# Altium PCB PCB_Flaps第三版_2023-07-31.pcbdoc
Units mil, origin at the board's own origin, x right, y up, seen from the top; angles counter-clockwise.
Board outline 2525.74 x 2390.85 mil, 2 copper layers (Top Layer, Bottom Layer); 36 components, 46 nets, 148 pads, 37 vias.
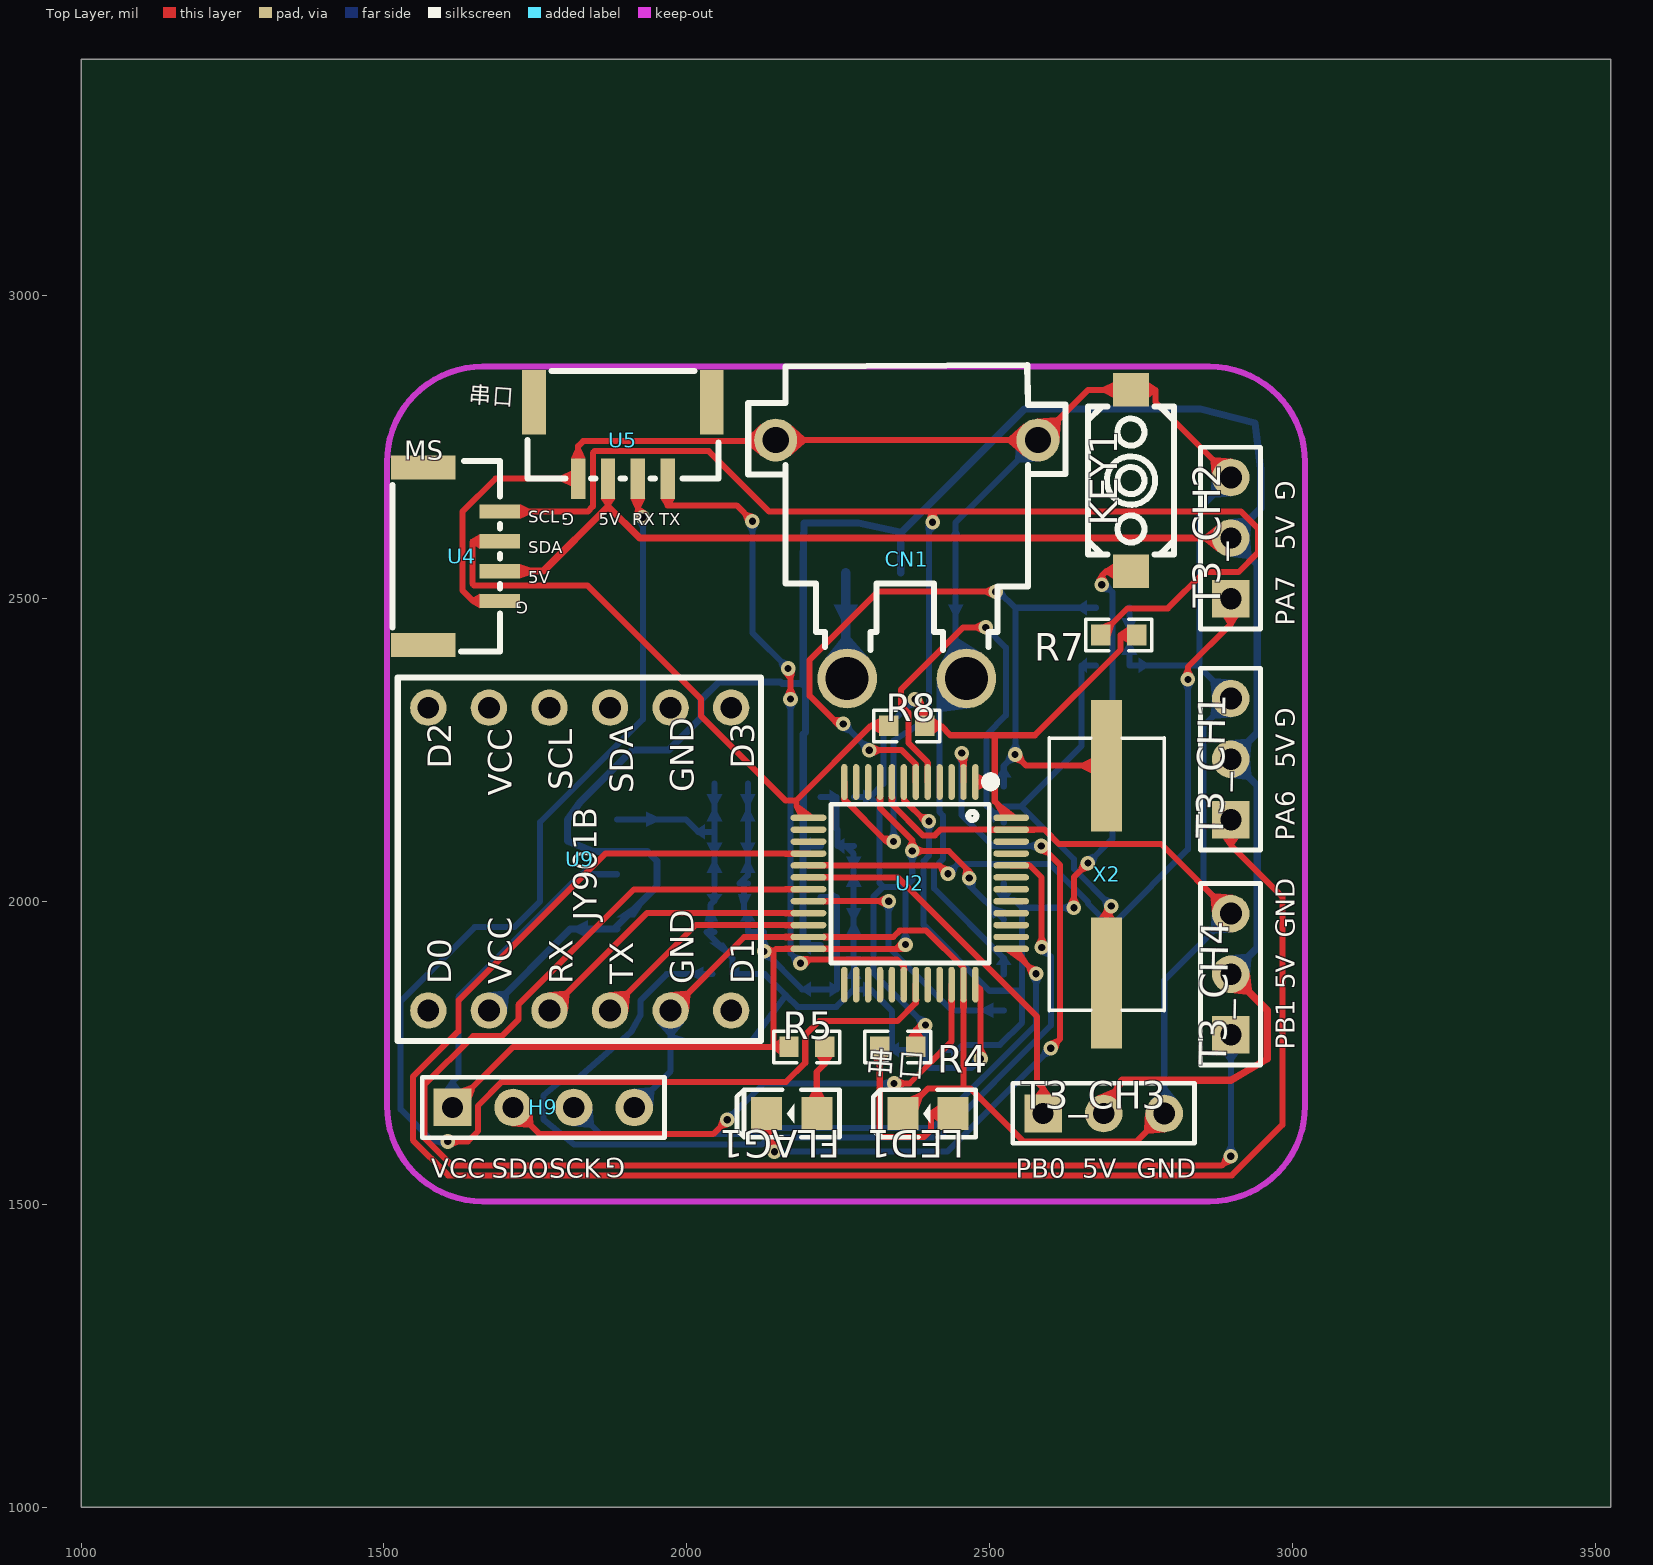
[diagram p0: Top Layer view]
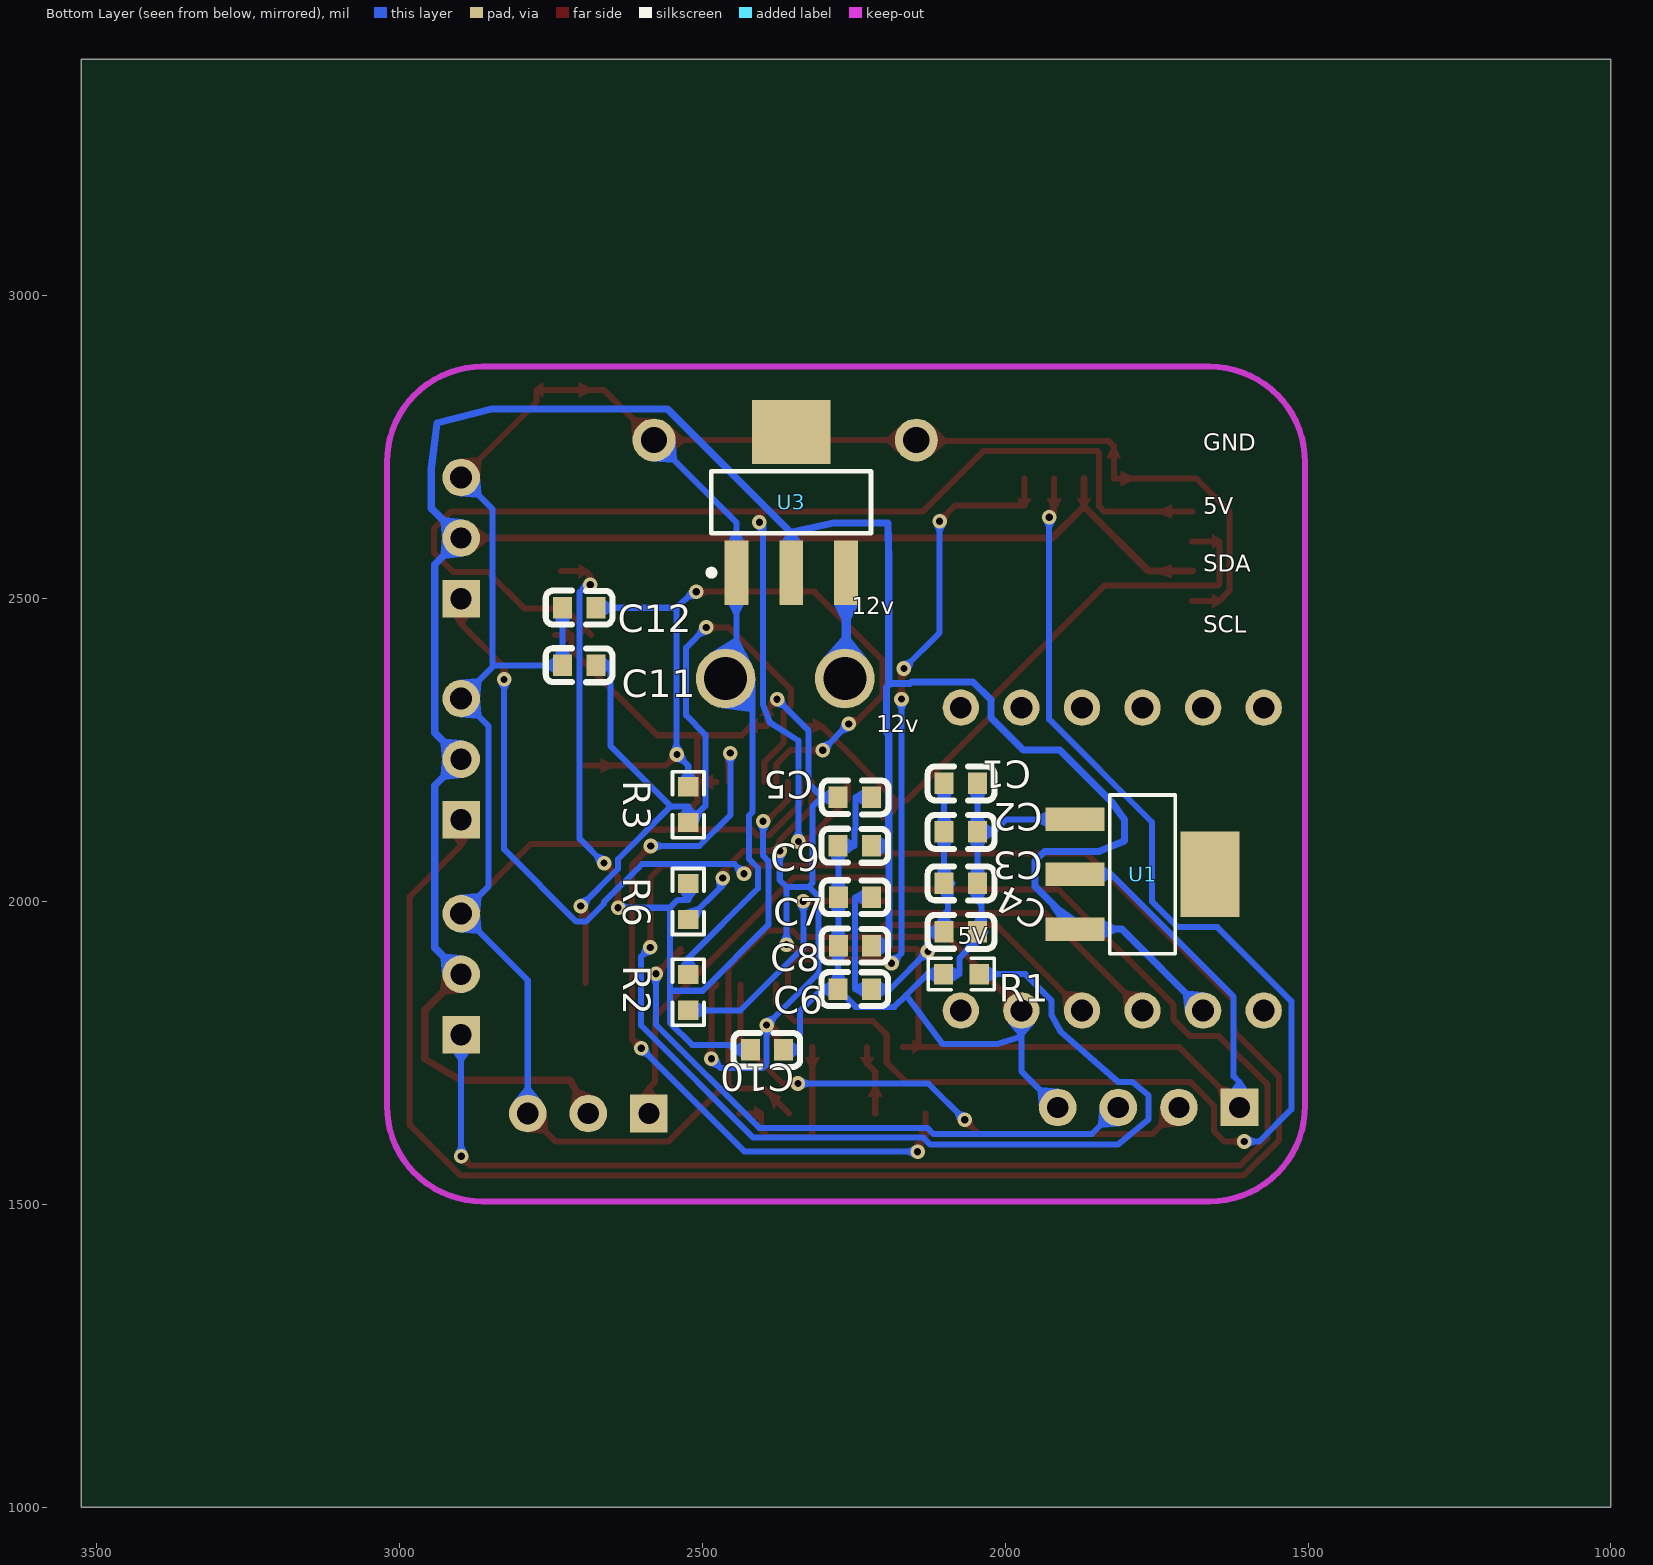
[diagram p1: Bottom Layer view, seen from below]

## Layer stack, top to bottom
Top Layer: signal copper (thickness not stored)
Dielectric: dielectric 12.6, FR-4, Dk 4.8
Bottom Layer: signal copper (thickness not stored)

## Board outline
3525.74,1000 1000,1000 1000,3390.85 3525.74,3390.85

## Components (designator, comment, footprint, x,y, rotation, side; value= is the part's Value field where it differs from the comment)
C1 "100nF" C0603#1 2073.27,2195 r180 bottom
C2 "100nF" C0603#1 2073.27,2115 r180 bottom
C3 "100nF" C0603#1 2073.27,2030 r180 bottom
C4 "100nF" C0603#1 2073.27,1950 r180 bottom
C5 "10uF" C0603#1 2248.27,2172.19 r180 bottom
C6 "100nF" C0603#2 2248.27,1855 r0 bottom
C7 "10uF" C0603#1 2247.99,2006.98 r0 bottom
C8 "10uF" C0603#1 2247.99,1926.98 r0 bottom
C9 "100nF" C0603#2 2248.27,2091.74 r0 bottom
C10 "0.1UF" C0603#1 2393.27,1755 r0 bottom
C11 "22pF" C0603#1 2703.27,2390 r0 bottom
C12 "22pF" C0603#1 2703.27,2485 r0 bottom
CN1 "XT30PW-M" CONN-TH_XT30PW-M 2363.27,2565 r180 top
FLAG1 "LED-0805_R" LED0805_RED 2173.27,1650 r180 top
H9 "HDR-F-2.54_1x4" HDR-F-2.54_1X4 1763.27,1660 r0 top
KEY1 "K2-3.6×6.1_SMD" KEY-SMD_2P-L6.2-W3.6-LS8.0 2733.27,2695 r90 top
LED1 "LED-0805_R" LED0805_RED 2398.27,1650 r180 top
R1 "10K" R0603#1 2072.46,1880.21 r180 bottom
R2 "10K" R0603#1 2523.27,1850 r90 bottom
R3 "1M" R0603#1 2523.27,2160 r90 bottom
R4 "510R" R0603#2 2348.27,1760 r180 top
R5 "510R" R0603#2 2198.27,1760 r0 top
R6 "10k" R0603#1 2523.27,2000 r90 bottom
R7 "10K" R0603#2 2713.27,2440 r180 top
R8 "10K" R0603#2 2363.27,2290 r180 top
T3_CH1 "HDR-F-2.54_1x3" HDR-F-2.54_1X3 2898.27,2235 r90 top
T3_CH2 "HDR-F-2.54_1x3" HDR-F-2.54_1X3 2898.27,2600 r90 top
T3_CH3 "HDR-F-2.54_1x3" HDR-F-2.54_1X3 2688.27,1650 r0 top
T3_CH4 "HDR-F-2.54_1x3" HDR-F-2.54_1X3 2898.27,1880 r90 top
U1 "AMS1117-3.3_SOT223" SOT-223-4_L6.5-W3.5-P2.30-LS7.0-BR 1773.27,2045 r180 bottom
U2 "STM32F103C8T6" LQFP-48_L7.0-W7.0-P0.50-LS9.0-BL 2368.27,2030 r180 top
U3 "AMS1117-5v SOT223" AMS1117-5V 2363.27,2645 r0 bottom
U4 "GH1.25-4PWBPZ" CONN-SMD_GH1.25-4PWBPZ 1628.27,2570 r90 top
U5 "GH1.25-4PWBPZ" CONN-SMD_GH1.25-4PWBPZ 1894.64,2761.36 r0 top
U9 "JY901B" "JY901B 插针" 1753.27,2025 r90 top
X2 "8MHz" HC-49S_L11.4-W4.8 2693.27,2045 r270 top

## Footprints (in the part's own frame and the unit in brackets; to place one, negate y for a bottom-side part, rotate by r counter-clockwise, add the part's x,y. Pads: shape width x height; smd on the part's side, far side on the other; paste and mask are expansions set on the pad)
AMS1117-5V [mm]
  rect 1x2.7 smd paste+0 mask+0.102: 1(2.046,2.594) 2(-0.254,2.594) 3(-2.554,2.594)
  rect 3.3x2.7 smd paste+0 mask+0.102: 4(-0.254,-3.306)
  silkscreen extent -3.6,-1.66 3.22,2.72
C0603#1 [mm]
  rect 0.8x0.9 smd paste+0 mask+0.051: 1(0.7,0) 2(-0.7,0)
  silkscreen extent -1.39,-0.72 1.41,0.71
C0603#2 [mm]
  rect 0.8x0.9 smd paste+0 mask+0.102: 1(0.7,0) 2(-0.7,0)
  silkscreen extent -1.4,-0.72 1.4,0.7
CONN-SMD_GH1.25-4PWBPZ [mm]
  rect 0.6x1.7 smd paste+0 mask+0.05: 1(-1.875,-1.601) 2(-0.625,-1.601) 3(0.625,-1.601) 4(1.875,-1.601)
  rect 1x2.7 smd paste+0 mask+0.05: 5(-3.725,1.601) 6(3.725,1.601)
  silkscreen extent -4,-1.6 4,2.9
CONN-TH_XT30PW-M [mm]
  round 2.5 hole 1.8 paste+0 mask+0.051: 1(-2.5,5) 2(2.5,5)
  round 1.8 hole 1.1 paste+0 mask+0.051: 3(5.5,-5) 4(-5.5,-5)
  silkscreen extent -6.65,-8.15 6.65,3.81
HC-49S_L11.4-W4.8 [mm]
  rect 5.5x1.3 smd paste+0 mask+0.051: 1(-4.553,0) 2(4.553,0)
  silkscreen extent -5.72,-2.41 5.72,2.41
HDR-F-2.54_1X3 [mil]
  rect 62x62 hole 35 paste+0 mask+2: 1(-100,0)
  round 62 hole 35 paste+0 mask+2: 2(0,0)
  round 62 hole 36 paste+0 mask+2: 3(100,0)
  silkscreen extent -150,-49 150,50
HDR-F-2.54_1X4 [mil]
  rect 62x62 hole 35 paste+0 mask+2: 1(-150,0)
  round 62 hole 35 paste+0 mask+2: 2(-50,0) 3(50,0) 4(150,0)
  silkscreen extent -200,-50 200,50
"JY901B 插针" [mil]
  round 60 hole 36 paste+0 mask+4: 1(-205,180) 2(-205,80) 3(-205,-20) 4(-205,-120) 5(-205,-220) 6(-205,-320) 7(295,180) 8(295,80) 9(295,-20) 10(295,-120) 11(295,-220) 12(295,-320)
  silkscreen extent -255,-370 345,230
KEY-SMD_2P-L6.2-W3.6-LS8.0 [mm]
  rect 1.4x1.5 smd paste+0 mask+0.051: 1(-3.8,0) 2(3.8,0)
  silkscreen extent -3.1,-1.8 3.1,1.8
LED0805_RED [mil]
  rect 51.2x55.1 smd paste+0 mask+2: 1(-41.35,0) 2(41.35,0)
  silkscreen extent -79,-39 91,39
LQFP-48_L7.0-W7.0-P0.50-LS9.0-BL [mm]
  oval 0.27x1.5 smd paste+0 mask+0.05: 1(-2.75,-4.25) 2(-2.25,-4.25) 3(-1.75,-4.25) 4(-1.25,-4.25) 5(-0.75,-4.25) 6(-0.25,-4.25) 7(0.25,-4.25) 8(0.75,-4.25) 9(1.25,-4.25) 10(1.75,-4.25) 11(2.25,-4.25) 12(2.75,-4.25) 25(2.75,4.25) 26(2.25,4.25) 27(1.75,4.25) 28(1.25,4.25) 29(0.75,4.25) 30(0.25,4.25) 31(-0.25,4.25) 32(-0.75,4.25) 33(-1.25,4.25) 34(-1.75,4.25) 35(-2.25,4.25) 36(-2.75,4.25)
  oval 1.5x0.27 smd paste+0 mask+0.05: 13(4.25,-2.75) 14(4.25,-2.25) 15(4.25,-1.75) 16(4.25,-1.25) 17(4.25,-0.75) 18(4.25,-0.25) 19(4.25,0.25) 20(4.25,0.75) 21(4.25,1.25) 22(4.25,1.75) 23(4.25,2.25) 24(4.25,2.75) 37(-4.25,2.75) 38(-4.25,2.25) 39(-4.25,1.75) 40(-4.25,1.25) 41(-4.25,0.75) 42(-4.25,0.25) 43(-4.25,-0.25) 44(-4.25,-0.75) 45(-4.25,-1.25) 46(-4.25,-1.75) 47(-4.25,-2.25) 48(-4.25,-2.75)
  silkscreen extent -3.59,-4.46 3.3,3.34
R0603#1 [mil]
  rect 31.75x34.02 smd paste-3937.01 mask+2: 1(29.65,0) 2(-29.66,0)
  silkscreen extent -55,-26 55,26
R0603#2 [mil]
  rect 31.75x34.02 smd paste-3937.01 mask+2: 1(-29.65,0) 2(29.66,0)
  silkscreen extent -55,-26 55,26
SOT-223-4_L6.5-W3.5-P2.30-LS7.0-BR [mm]
  rect 2.47x0.98 smd paste+0 mask+0.051: 1(-2.835,2.3) 2(-2.835,0) 3(-2.835,-2.3)
  rect 2.47x3.6 smd paste+0 mask+0.051: 4(2.835,0)
  silkscreen extent -1.37,-3.33 1.37,3.33

## Via types
v1: diameter 24.02, hole 12.01, Top Layer to Bottom Layer, tented both sides, 37 vias

## Nets (pads, with @x,y where several pads share a name; then routed paths per layer and width w, separated by ;. In a path a pad name is that pad's centre, name@x,y a point inside that pad or via, vN(x,y) a via of type N, cw(c..) or ccw(c..) an arc to the next point about the centre after c; other vN are vias at no path point)
12V: CN1.2 U3.3 | length 175.7
  Bottom Layer w15.75: U3.3 2262.67,2370.3 CN1.2@2264.87,2368.1
+5V: C8.2 C9.2 T3_CH1.2 T3_CH2.2 T3_CH3.2 T3_CH4.2 U1.3 U3.2 U4.2 U5.2 U9.2 | length 5585.1
  Top Layer w11.81: U4.2 1763.17,2545.4 1870.07,2652.3 ; 1870.02,2656.9 1870.02,2652.26 1922.28,2600 T3_CH2.2 ; 1870.07,2656.9 U5.2@1870.07,2698.3 ; T3_CH3.2 2718.27,1705 2898.27,1705 2958.27,1740 2958.27,1820.5 T3_CH4.2
  Bottom Layer w11.81: U9.2 1807.67,1954.4 1858.87,1954.4 1880.07,1954.4 1950.97,2025.3 1950.97,2067.1 1935.37,2082.7 1844.77,2082.7 1803.27,2100 1803.27,2135 1823.67,2164 1909.97,2250.3 1970.27,2250.3 2023.27,2303.3 2023.27,2333 2052.97,2362.6 2154.57,2362.6 2157.07,2360.1 2189.77,2360.1 ; U1.3@1858.89,1954.45 U1.3 ; 2189.8,2360.1 2195.83,2354.07 2195.83,2279.58 2192.33,2276.08 2192.33,2091.74 2192.06,2091.47 2192.06,1926.98 C8.2@2220.47,1927 ; 2190.27,2360.1 2192.27,2362.6 2192.27,2564 2193.27,2625 2278.27,2625 2283.27,2625 2352.27,2609.9 2353.27,2608.6 ; 2192.37,2091.7 C9.2 ; U3.2 2353.27,2608.6 ; T3_CH4.2 2941.89,1923.63 2941.89,2191.37 T3_CH1.2 2941.89,2278.63 2941.89,2556.37 T3_CH2.2 2947.57,2649.3 2947.57,2714.1 2938.27,2790 2848.27,2813.4 2557.97,2813.4 2353.27,2608.6
BOOT0: R1.1 U2.44 | length 1660.8
  Top Layer w10: U2.44 2566.07,2059.5 2585.97,2039.6 v1(2585.99,1924.22)
  Bottom Layer w10: R1.1 1966.97,1880.2 1923.27,1836.5 1923.27,1811.9 1908.27,1785 1813.47,1702.1 1789.57,1702.1 1763.27,1680 1763.27,1640 1814.07,1598.6 2123.67,1598.6 2135.27,1610.1 2416.07,1610.1 2601.37,1795.4 2601.37,1908.9 v1(2585.99,1924.22)
GND: C1.1 C2.1 C3.1 C4.1 C5.1 C6.1 C7.1 C8.1 C9.1 C10.2 C11.1 C12.1 CN1.1 CN1.3 CN1.4 H9.4 KEY1.2 LED1.2 R1.2 R2.1 T3_CH1.3 T3_CH2.3 T3_CH3.3 T3_CH4.3 U1.1 U2.8 U2.23 U2.35 U2.47 U3.1 U4.1 U5.1 U9.5 | length 7810.8
  Top Layer w10: U4.1 1646.87,2496.2 1629.47,2513.6 1629.47,2643.6 1684.17,2698.3 U5.1 1820.77,2751.9 1829.07,2760.2 2145.07,2760.2 CN1.3@2146.77,2761.8 ; U9.5 2094.67,1941.4 2200.97,1941.4 2341.07,1941.4 2351.57,1951.9 2395.27,1951.9 2456.87,1890.4 2456.87,1862.7 2456.87,1691 ; CN1.3 CN1.4 ; U2.8@2338.77,2197.3 2338.77,2160.5 2389.87,2109.3 2409.37,2109.3 2418.67,2118.6 U2.47 2590.77,2118.6 2614.37,2095 2783.27,2095 T3_CH4.3 ; LED1.2 2397.97,1691 2456.87,1691 ; CN1.4@2579.77,2761.8 2662.57,2844.6 KEY1.2 2773.77,2844.6 ; 2773.78,2844.6 2773.78,2824.48 T3_CH2.3 ; T3_CH3.3 2741.92,1603.66 2556.05,1603.66 2468.69,1691.02 2456.84,1691.02
  Bottom Layer w10: U1.1@1884.87,2135.5 1998.37,2135.5 2018.97,2115 C2.1 ; H9.4 1973.26,1720 1973.26,1777.34 U9.5 ; 1973.27,1777.3 2013.27,1765 2103.27,1765 2163.57,1845.6 2182.97,1826.2 2247.07,1826.2 C6.1@2275.87,1855 ; C4.1@2039.07,1950 2039.07,1994.6 2045.67,2001.3 C3.1 C2.1 ; C1.1 C2.1 ; C4.1 2039.02,1950 2032.33,1950 2075.27,1907.1 2075.27,1880.2 R1.2 2128.97,1880.2 ; 2128.98,1880.21 2163.57,1845.63 ; C5.1 2247.47,2172.2 2247.44,2120.12 2249.08,2118.48 2249.08,2091.74 ; 2249.07,2091.7 2262.47,2091.7 2275.57,2078.6 2275.57,2007 C8.1 2275.57,1898.3 2275.87,1898 C6.1@2275.87,1855 ; C9.1@2262.45,2091.74 C9.1 ; C10.2 2338.97,1755 2338.96,1818.6 2302.56,1855 C6.1@2275.87,1855 ; 2443.77,2464.4 U3.1 2443.77,2625.9 CN1.4@2579.77,2761.8 ; CN1.1 2443.81,2386.02 2443.81,2464.45 2443.81,2378.58 2417.34,2352.11 2417.34,2147.5 2422.88,2141.96 2422.88,2070.06 2408.17,2055.35 2408.17,2021.61 2523.26,1906.52 R2.1 ; C12.1@2730.87,2485 2730.87,2390 2757.57,2390 2843.26,2390 ; T3_CH3.3 2788.26,1870 T3_CH4.3 2852.77,2025.49 2852.77,2289.51 T3_CH1.3 2843.26,2390 ; T3_CH2.3 2846.64,2648.38 2846.64,2393.38 2843.26,2390
PA0: U2.10
PA1: U2.11
PA4: U2.14
PA5: U2.15
PA6: T3_CH1.1 U2.16 | length 2972.9
  Top Layer w10: U2.16 1865.57,2079.2 1622.77,1836.4 1622.77,1785.7 1547.87,1710.8 1547.87,1606 1605.97,1548 2899.87,1548 2983.27,1631.4 2983.27,2008 2898.27,2093 T3_CH1.1
PA7: T3_CH2.1 U2.17 | length 1172.3
  Top Layer w10: U2.17@2200.97,2059.5 2417.47,2059.5 v1@2431.27,2045.8 ; v1(2827.44,2366.6) 2827.43,2387.18 2898.26,2458.01 T3_CH2.1
  Bottom Layer w10: v1(2431.24,2045.8) 2447.36,2061.93 2599.55,2061.93 2662.19,1999.29 2662.19,1996.77 2692.16,1966.8 2707.98,1966.8 2827.43,2086.25 v1(2827.44,2366.6)
PA8: U2.29
PA9: U2.30 U5.4 | length 1166.2
  Top Layer w10: U5.4 1968.47,2653.9 2082.32,2653.89 v1(2108.39,2627.83) ; v1(2167.26,2384.73) 2171.2,2380.78 v1(2171.21,2334.25) ; v1(2187.77,1898.07) 2194.17,1904.5 2347.07,1904.5 2358.47,1893.1 U2.30@2358.47,1862.7
  Bottom Layer w10: v1(2108.39,2627.83) 2108.38,2443.6 v1(2167.26,2384.73) ; v1(2171.21,2334.25) 2171.2,1914.63 v1(2187.77,1898.07)
PA10: U2.31 U5.3 | length 2297.6
  Top Layer w10: v1@1605.47,1603.8 1638.37,1603.8 1655.37,1620.8 1655.37,1662.7 1694.77,1702.1 2163.87,1702.1 2195.57,1733.7 2195.57,1779.8 2218.47,1802.7 2348.07,1802.7 2378.07,1832.7 U2.31 ; U5.3@1919.27,2698.3 1919.27,2642.4 v1(1927.4,2634.24)
  Bottom Layer w10: v1(1605.45,1603.8) 1580.76,1603.8 1527.5,1657.06 1527.5,1835.47 1649.79,1957.76 1715.31,1957.76 1758,2000.45 1758,2131.33 1927.39,2300.72 v1(1927.4,2634.24)
PA11: U2.32
PA12: U2.33
PA15: U2.38
PB0: T3_CH3.1 U2.18 | length 636.7
  Top Layer w10: U2.18 2348.57,2039.8 2577.97,1810.4 2577.97,1702.2 2588.27,1692 T3_CH3.1
PB1: T3_CH4.1 U2.19 | length 2427.4
  Top Layer w10: U2.19@2200.97,2020.2 1912.87,2020.2 1722.07,1829.4 1722.07,1805 1694.87,1777.8 1647.27,1777.8 1566.67,1697.2 1566.67,1610 1612.57,1564 2883.07,1564 v1(2898.27,1579.27)
  Bottom Layer w10: v1(2898.27,1579.27) 2898.26,1738.01 T3_CH4.1
PB2: R2.2 U2.20 | length 441.7
  Top Layer w10: U2.20 v1@2333.37,2000.5
  Bottom Layer w10: v1@2333.37,2000.5 2333.37,1924.1 2437.07,1820.3 R2.2
  other v1: 2333.34,2000.47
PB3: U2.39
PB4: U2.40
PB5: U2.41
PB6: U2.42
PB7: U2.43
PB8: U2.45
PB9: U2.46
PB10: U2.21 U9.3 | length 494.3
  Top Layer w10: U9.3 1934.07,1980.8 U2.21@2200.97,1980.8
PB11: U2.22 U9.4 | length 386.1
  Top Layer w10: U9.4 2014.37,1961.1 U2.22
PB12: U2.25
PB13: U2.26
PB14: U2.27
PB15: U2.28
PC13: FLAG1.2 U2.2 | length 1252
  Top Layer w10: 2131.87,1611.5 FLAG1.2 ; 2131.91,1611.46 2144.77,1598.6 v1(2144.78,1587.09) ; v1@2453.77,2245.1 2456.87,2242.1 U2.2@2456.87,2197.3 ; v1(2585.04,2091.69) 2616.07,2060.65 2616.07,1772.95 v1(2601.07,1757.94)
  Bottom Layer w10: v1(2144.78,1587.09) 2430.21,1587.09 v1(2601.07,1757.94) ; v1(2453.8,2245.15) 2453.79,2142.71 2504.81,2091.69 v1(2585.04,2091.69)
PC14: U2.3
PC15: U2.4
PD0: C11.2 R3.2 U2.5 X2.2 | length 1418.4
  Top Layer w10: U2.5 2397.77,2230.1 2365.97,2261.9 2365.97,2311.9 2353.57,2324.3 2353.57,2349.8 2456.27,2452.5 v1(2493.52,2452.47) ; X2.2@2693.27,1865.7 2693.27,1985 v1(2700.7,1992.44)
  Bottom Layer w10: v1(2493.52,2452.47) 2526.77,2419.2 2526.77,2307.2 2495.17,2275.6 2495.17,2157.8 2509.27,2143.8 R3.2@2523.27,2143.8 ; R3.2 R3.2@2523.26,2143.78 ; 2651.97,2390 C11.2 ; 2652,2390 2652,2257.08 2552.13,2157.21 ; v1(2700.7,1992.44) 2639.28,2053.85 2639.28,2070.06 2552.13,2157.21 ; R3.2@2523.27,2143.8 2523.27,2157.2 2552.13,2157.21
PD1: C12.2 R3.1 U2.6 X2.1 | length 1303.6
  Top Layer w10: v1(2258.11,2293.22) 2249.05,2293.22 2202.79,2339.48 2202.79,2399.09 2315.21,2511.51 v1(2510.2,2511.51) ; v1(2301.41,2249.92) 2354.67,2249.9 2378.07,2226.5 U2.6 ; v1@2541.97,2242.7 2560.47,2224.2 X2.1@2693.27,2224.2
  Bottom Layer w10: v1(2258.11,2293.22) v1(2301.41,2249.92) ; v1(2510.2,2511.51) 2515.39,2511.51 2542.85,2484.05 ; R3.1 2523.27,2216.5 2523.26,2224.07 v1(2541.94,2242.74) 2542.85,2243.66 2542.85,2484.05 ; C12.2 2662.33,2485 2648.97,2485 2543.8,2485 2542.85,2484.05
R4_2: LED1.1 R4.2 | length 299
  Top Layer w10: R4.2 2318.57,1615.9 2323.17,1611.4 2391.87,1611.4 2403.07,1622.6 2403.07,1650 LED1.1
R5_2: FLAG1.1 R5.2 | length 115.6
  Top Layer w10: FLAG1.1 2214.57,1718.7 2227.97,1732 R5.2@2227.97,1760
RESET: C10.1 KEY1.1 R6.1 U2.7 | length 1592.7
  Top Layer w10: U2.7@2358.47,2197.3 2358.47,2168 2394.07,2132.4 v1@2399.87,2132.4 ; v1(2639.14,1989.73) 2639.13,2040.23 v1(2662.35,2063.44) ; v1(2685.33,2523.11) 2685.32,2537.98 2692.74,2545.4 KEY1.1
  Bottom Layer w10: v1(2399.83,2132.4) 2399.82,2075.66 2390.89,2066.73 2390.89,1961.3 2499.47,1852.72 2553.54,1852.72 ; C10.1@2420.87,1755 2447.57,1755 2455.83,1763.27 2516.88,1763.27 2553.54,1799.93 2553.54,1852.72 ; R6.1 2523.27,2002.8 2540.48,2002.79 2553.54,1989.73 ; v1(2639.14,1989.73) 2553.54,1989.73 ; v1(2662.35,2063.44) 2702.51,2103.61 2702.51,2510.87 2690.27,2523.11 v1(2685.33,2523.11) ; 2553.54,1852.72 2553.54,1989.73
S$68: 
SCL: R7.2 U2.12 U4.4 | length 2467.6
  Top Layer w10: U4.4 1836.67,2643.8 1845.07,2652.3 1845.07,2740.6 1847.97,2743.5 2036.27,2743.5 2136.07,2643.8 2405.77,2643.8 2915.17,2643.8 2942.97,2616 2942.97,2576 2911.07,2544 2854.17,2544 2794.07,2483.9 2727.57,2483.9 R7.2 ; U2.12 2259.97,2168.7 2329.57,2099.1 v1(2341.48,2099.12) ; v1(2405.73,2626.23) 2405.72,2643.78
  Bottom Layer w10: v1(2341.48,2099.12) 2341.47,2266 2388.27,2295 2399.67,2324.3 2399.67,2620.2 v1@2405.77,2626.2
SDA: R8.2 U2.13 U4.3 | length 1054.5
  Top Layer w10: U4.3 1646.87,2594.6 1646.1,2593.87 1646.1,2524.77 1649.01,2521.86 1836.03,2521.86 2023.26,2334.63 2023.26,2306.69 2162.84,2167.11 2181.17,2167.11 ; U2.13@2200.97,2138.3 2181.17,2158 2181.17,2167.1 ; R8.2 2304.07,2290 2181.17,2167.1
SWCLK: H9.3 U2.37 | length 998.3
  Top Layer w10: U2.37 v1(2576.61,1880.71)
  Bottom Layer w10: H9.3 1857.07,1616.19 2118.56,1616.19 2128.57,1626.2 2406.18,1626.2 2576.6,1796.62 v1(2576.61,1880.71)
SWDIO: H9.2 U2.34 | length 899.3
  Top Layer w10: H9.2 1757.29,1615.97 2043.4,1615.97 v1(2067.04,1639.6) ; v1(2342.19,1699.53) 2367.67,1699.5 2437.17,1769 U2.34
  Bottom Layer w10: v1(2067.04,1639.6) 2126.96,1699.53 v1(2342.19,1699.53)
VCC: C1.2 C2.2 C3.2 C4.2 C5.2 C6.2 C7.2 H9.1 R4.1 R5.1 R6.2 R7.1 R8.1 U1.2 U2.1 U2.9 U2.24 U2.36 U2.48 | length 4372.5
  Top Layer w10: H9.1 1713.27,1760 2143.17,1760 R5.1 ; v1(2127.57,1917.64) 2143.18,1917.64 2143.18,1760 ; 2143.17,1917.6 2147.27,1921.7 U2.24 2353.97,1921.7 v1(2361.12,1928.89) ; U2.9 2319.07,2154.2 2372.27,2101 v1@2372.27,2083.4 ; v1(2372.25,2083.45) 2432.55,2083.45 2466.41,2049.59 v1(2466.42,2038.75) ; v1(2376.66,2333.85) 2392.5,2318 2392.92,2318 ; 2377.92,1788 2385.91,1788 v1(2394.01,1796.09) ; R4.1@2377.97,1760 2377.97,1788 ; 2392.97,2318 2392.97,2290 2419.77,2290 ; 2419.78,2290 2435.24,2274.54 2508.49,2274.54 ; U2.36@2476.57,1862.7 2485.07,1854.2 v1(2485.06,1740.21) ; U2.1@2476.57,2197.3 2508.47,2197.3 2508.47,2165.4 U2.48 ; 2508.49,2197.32 2508.49,2274.54 ; R7.1@2742.97,2440 2716.07,2440 2716.05,2415.89 2574.7,2274.54 2508.49,2274.54
  Bottom Layer w10: H9.1 1613.27,1702 1622.8,1711.53 1622.8,1842.54 1825.26,2045 U1.2 ; C3.2 C3.2@2094.14,2030 ; C1.2@2100.87,2195 2100.87,2115 2100.87,2043.4 2087.47,2030 C3.2@2094.14,2030 ; C7.2@2220.47,2007 2247.17,2007 2247.9,2006.25 2247.9,1855.46 2247.44,1855 C6.2 2193.97,1855 2190.2,1855 v1(2127.57,1917.64) 2127.56,1950 2100.87,1950 2100.87,1978.7 2094.17,1985.4 C3.2@2094.17,2030 ; C5.2@2275.87,2172.2 2302.57,2172.2 ; v1(2361.12,1928.89) 2361.11,2024.33 ; v1(2372.25,2083.45) 2372.24,2035.46 2361.11,2024.33 ; v1(2376.66,2333.85) 2324.47,2281.67 2324.47,2194.1 2302.56,2172.19 ; v1@2466.37,2038.7 2466.37,2027.2 R6.2 ; v1(2485.06,1740.21) 2469.7,1724.86 2400.81,1724.86 2394,1731.67 v1(2394.01,1796.09) 2308.08,1882.01 2308.08,2007.98 2324.43,2024.33 ; 2302.56,2172.19 2318.41,2156.34 2318.41,2030.35 2324.43,2024.33 ; 2324.43,2024.33 2361.11,2024.33
pads on no net: U1.4 U3.4 U4.5 U4.6 U5.5 U5.6 U9.1 U9.6 U9.7 U9.8 U9.9 U9.10 U9.11 U9.12

## Keep-outs
Keep-Out Layer:
  lines w10: 1505,1662.48 ccw(c1662.48,1662.48) 1662.48,1505 ; 1505,2725.47 cw(c1662.48,2725.47) 1662.48,2882.95 ; 2863.26,1505 ccw(c2863.26,1662.48) 3020.74,1662.48 ; 2863.26,2882.95 cw(c2863.26,2725.47) 3020.74,2725.47

## Other copper
Top Layer:
  region net VCC: 2517.77,2143.59 2542.77,2143.59 2522.34,2158.59 2508.2,2158.59
  region net GND: 2559.8,2113.27 2559.8,2123.9 2574.8,2123.58 2574.8,2113.58
  region net GND: 2511.38,2113.27 2511.38,2123.9 2496.38,2123.58 2496.38,2113.58
  region net BOOT0: 2559.8,2054.22 2559.8,2064.85 2566.03,2064.53 2566.03,2054.53
  region net SWCLK: 2553.39,1916.42 2528.39,1916.42 2548.82,1901.42 2562.97,1901.42
  region net VCC: 2485.06,1861.23 2481.85,1844.86 2481.85,1851.63 2481.52,1850.63 2481.85,1869.86 2481.85,1851.63 2485.06,1861.23
  region net GND: 2462.16,1838.47 2451.53,1838.47 2451.84,1823.47 2461.84,1823.47
  region net SWDIO: 2442.48,1838.47 2431.85,1838.47 2432.16,1823.47 2442.16,1823.47
  region net PA10: 2383.42,1838.46 2372.79,1838.47 2373.1,1832.73 2383.1,1832.72
  region net PA9: 2363.74,1886.9 2353.11,1886.89 2353.42,1893.12 2363.42,1893.13
  region net VCC: 2176.74,1916.42 2176.73,1927.05 2161.73,1926.73 2161.74,1916.73
  region net VCC: 2225.16,1916.42 2225.16,1927.05 2240.16,1926.73 2240.16,1916.73
  region net GND: 2225.16,1936.11 2225.16,1946.74 2240.16,1946.42 2240.16,1936.42
  region net GND: 2176.74,1936.11 2176.73,1946.74 2161.73,1946.42 2161.74,1936.42
  region net PB11: 2176.74,1955.79 2176.73,1966.42 2161.73,1966.1 2161.74,1956.1
  region net PB10: 2176.74,1975.48 2176.73,1986.11 2161.73,1985.79 2161.74,1975.79
  region net PB2: 2225.16,1995.16 2225.16,2005.79 2240.16,2005.47 2240.16,1995.47
  region net PB1: 2176.74,2014.85 2176.73,2025.48 2161.73,2025.16 2161.74,2015.16
  region net PB0: 2225.16,2034.53 2225.16,2045.16 2240.16,2044.84 2240.16,2034.84
  region net PA7: 2225.16,2054.22 2225.16,2064.85 2240.16,2064.53 2240.16,2054.53
  region net PA6: 2176.74,2073.9 2176.73,2084.53 2161.73,2084.2 2161.74,2074.2
  region net SDA: 2183.13,2143.59 2208.13,2143.59 2188.24,2158.04 2177.64,2154.51
  region net VCC: 2324.37,2173.11 2313.74,2173.11 2314.05,2158.11 2324.05,2158.11
  region net GND: 2344.05,2173.11 2333.42,2173.11 2333.73,2160.48 2343.73,2160.48
  region net PD0: 2403.11,2221.54 2392.48,2221.53 2392.79,2230.13 2402.79,2230.13
  region net PC13: 2462.16,2221.54 2451.53,2221.53 2451.84,2236.53 2461.84,2236.54
  region net VCC: 2481.85,2209.82 2481.85,2184.82 2496.85,2192.32 2496.85,2202.32
  region net PD0: 2680.76,1974 2705.76,1974 2698.26,1985.01 2688.26,1985.01
  region net PD1: 2667.67,2211.75 2667.67,2236.75 2652.67,2229.25 2652.67,2219.25
  region net PB0: 2575.76,1681 2600.76,1681 2593.26,1691.99 2583.26,1691.99
  region net GND: 2762.77,2857.1 2762.77,2832.1 2773.79,2839.6 2773.79,2849.6
  region net GND: 2703.77,2832.1 2703.77,2857.1 2688.77,2849.6 2688.77,2839.6
  region net RESET: 2703.77,2532.9 2703.77,2557.9 2692.75,2550.4 2692.75,2540.4
  region net VCC: 1626.58,1691 1644.27,1673.34 1649.57,1689.24 1642.5,1696.31
  region net GND: 2370.17,1677.55 2382.52,1655.81 2388.91,1674.93 2383.79,1683.95
  region net R4_2: 2414.02,1637.5 2414.02,1662.5 2403.02,1655 2403.02,1645
  region net PC13: 2144.42,1622.45 2119.42,1622.45 2126.92,1611.46 2136.92,1611.46
  region net R5_2: 2202.12,1677.55 2227.12,1677.55 2219.62,1692.55 2209.62,1692.55
  region net PA7: 2910.76,2469 2885.76,2469 2893.26,2458.01 2903.26,2458.01
  region net PA6: 2910.76,2104 2885.76,2104 2893.26,2093.01 2903.26,2093.01
  region net VCC: 2152.74,1772.5 2152.74,1747.5 2143.18,1755 2143.18,1765
  region net R5_2: 2240.43,1743 2215.43,1743 2222.93,1732 2232.93,1732
  region net VCC: 2390.43,1777.01 2365.43,1777.01 2372.93,1788 2382.93,1788
  region net R4_2: 2331.1,1743 2306.1,1743 2313.6,1728 2323.6,1728
  region net PA9: 1980.26,2664.88 1956.64,2664.88 1963.44,2653.89 1973.44,2653.89
  region net PA10: 1931.05,2664.88 1907.43,2664.88 1914.23,2649.88 1924.23,2649.88
  region net +5V: 1881.84,2664.88 1858.21,2664.88 1864.12,2656.9 1875.93,2656.9
  region net GND: 1809,2685.84 1809,2710.84 1794,2703.34 1794,2693.34
  region net GND: 1809,2731.81 1832.63,2731.81 1825.81,2746.81 1815.81,2746.81
  region net SCL: 1724.75,2655.63 1724.75,2632.01 1739.75,2638.82 1739.75,2648.82
  region net SDA: 1657.82,2582.8 1657.82,2606.42 1646.83,2599.6 1646.83,2589.6
  region net +5V: 1724.75,2557.2 1724.75,2533.58 1742.47,2539.48 1742.47,2551.3
  region net GND: 1657.82,2484.37 1657.82,2507.99 1646.83,2501.18 1646.83,2491.18
  region net VCC: 2405.43,2307 2380.43,2307 2387.93,2318 2397.93,2318
  region net VCC: 2408.77,2277.5 2408.77,2302.5 2419.78,2295 2419.78,2285
  region net SDA: 2317.77,2277.5 2317.77,2302.5 2304.06,2295 2304.06,2285
  region net VCC: 2727.05,2452.5 2727.05,2427.5 2716.06,2435 2716.06,2445
  region net SCL: 2684.8,2457.01 2699.49,2436.78 2705.17,2454.49 2699.22,2462.69
  region net SCL: 2335.93,2109.77 2331.6,2092.29 2324.2,2097.39 2327.01,2108.72
  region net SCL: 2396.72,2634.17 2414.73,2634.17 2410.72,2642.58 2400.72,2642.58
  region net PA9: 2198.6,1892.89 2191.55,1909.47 2200.68,1909.47 2204.94,1899.47
  region net PA9: 2162.2,2342.19 2180.21,2342.19 2176.2,2350.6 2166.2,2350.6
  region net PA9: 2160.43,2374.85 2177.91,2379.2 2176.2,2370.11 2166.2,2367.62
  region net PA9: 2109.14,2639.82 2096.4,2627.08 2093.29,2635.86 2100.36,2642.93
  region net PA7: 2431.99,2057.78 2419.25,2045.05 2416.14,2053.83 2423.21,2060.9
  region net PA7: 2818.43,2374.54 2836.44,2374.54 2832.43,2382.95 2822.43,2382.95
  region net SWDIO: 2350.13,1690.52 2350.13,1708.54 2358.53,1704.53 2358.53,1694.53
  region net SWDIO: 2067.79,1627.62 2055.05,1640.35 2051.94,1631.58 2059.01,1624.51
  region net SWCLK: 2577.35,1892.69 2564.62,1879.96 2561.51,1888.73 2568.58,1895.81
  region net BOOT0: 2576.98,1932.16 2594.99,1932.16 2590.98,1940.57 2580.98,1940.57
  region net PB2: 2325.39,1991.46 2325.39,2009.48 2316.98,2005.47 2316.98,1995.47
  region net PD1: 2553.92,2243.49 2541.18,2230.76 2549.96,2227.65 2557.03,2234.72
  region net PD1: 2309.35,2240.92 2309.35,2258.93 2317.75,2254.92 2317.75,2244.92
  region net PD1: 2254.1,2304.55 2247.37,2287.84 2240.91,2294.3 2244.97,2304.38
  region net PD1: 2502.25,2502.5 2502.25,2520.52 2493.84,2516.51 2493.84,2506.51
  region net PD0: 2689.06,1989.46 2705.11,1981.27 2698.26,1975.33 2688.26,1980.43
  region net PD0: 2485.57,2443.46 2485.57,2461.48 2477.16,2457.47 2477.16,2447.47
  region net PB1: 2899.02,1567.29 2886.28,1580.02 2883.17,1571.25 2890.24,1564.18
  region net RESET: 2397.57,2144.2 2388.41,2128.69 2383.13,2136.28 2388.38,2145.17
  region net RESET: 2630.13,1997.67 2648.14,1997.67 2644.13,2006.08 2634.13,2006.08
  region net RESET: 2663.1,2051.46 2650.36,2064.19 2647.25,2055.42 2654.32,2048.35
  region net RESET: 2676.32,2531.05 2694.33,2531.05 2690.32,2537.98 2680.32,2537.98
  region net PC13: 2464.12,2239.03 2446.43,2235.67 2451.84,2228.14 2461.84,2230.04
  region net PC13: 2597.02,2092.44 2584.28,2079.71 2593.06,2076.6 2600.13,2083.67
  region net PC13: 2613.05,1757.19 2600.31,1769.93 2609.09,1773.04 2616.16,1765.97
  region net PC13: 2151.39,1597.11 2134,1592.41 2134.94,1601.37 2146.07,1604.38
  region net PA10: 1613.39,1594.79 1613.39,1612.81 1621.79,1608.8 1621.79,1598.8
  region net PA10: 1915.63,2636.63 1931.23,2645.62 1924.23,2651.29 1914.23,2645.53
  region net VCC: 2476.05,1748.15 2494.06,1748.15 2490.06,1756.56 2480.06,1756.56
  region net VCC: 2135.51,1908.64 2135.51,1926.65 2143.18,1922.64 2143.18,1912.64
  region net VCC: 2357.92,1917.32 2350.03,1933.51 2343.98,1926.73 2348.85,1916.73
  region net VCC: 2363.24,2091.39 2381.25,2091.39 2377.24,2099.8 2367.24,2099.8
  region net VCC: 2380.19,2074.45 2380.19,2092.46 2388.59,2088.45 2388.59,2078.45
  region net VCC: 2391.56,1784.33 2382.65,1799.99 2376.95,1793 2382.65,1783
  region net VCC: 2472.7,2048.98 2455.47,2043.71 2456.21,2052.72 2467.03,2056.04
  region net VCC: 2388.64,2334.61 2375.9,2321.87 2384.68,2318.76 2391.75,2325.83
  region net GND: 1971.39,1849.94 2003.21,1818.13 2005.68,1845.35 1998.61,1852.42
  region net PB11: 1871.39,1849.94 1903.21,1818.13 1905.68,1845.35 1898.61,1852.42
  region net PB10: 1771.39,1849.94 1803.21,1818.13 1805.68,1845.35 1798.61,1852.42
  region net GND: 2867.33,1978.06 2900.21,2010.94 2871.96,2013.38 2864.89,2006.31
  region net +5V: 2896.46,1849.06 2929.2,1882.07 2932.39,1854.48 2924.08,1846.09
  region net GND: 2757.33,1651.94 2790.21,1619.06 2761.96,1616.62 2754.89,1623.7
  region net +5V: 2718.5,1656.87 2677.68,1679.14 2703.29,1689.88 2713.66,1684.23
  region net SWDIO: 1711.32,1629.06 1744.21,1661.94 1746.64,1633.69 1739.57,1626.62
  region net GND: 2556.37,2735.28 2556.37,2788.43 2531.57,2766.85 2531.57,2756.85
  region net GND: 2577.59,2797.22 2615.17,2759.63 2617.45,2792.43 2610.38,2799.5
  region net GND: 2124.23,2734.48 2122.38,2787.59 2098.34,2765.17 2098.69,2755.17
  region net GND: 2170.17,2788.43 2170.17,2735.28 2194.97,2756.85 2194.97,2766.85
  region net GND: 2867.33,2698.06 2900.21,2730.94 2871.96,2733.38 2864.89,2726.31
  region net +5V: 2877.76,2576.75 2877.76,2623.25 2856.06,2605.91 2856.06,2594.1
Bottom Layer:
  region net RESET: 2436.57,1742.5 2436.57,1767.5 2447.56,1760 2447.56,1750
  region net GND: 2349.96,1767.5 2349.96,1742.5 2338.97,1750 2338.97,1760
  region net +5V: 1836.26,1939.69 1836.26,1969.21 1818.54,1960.36 1818.54,1948.54
  region net +5V: 1884.64,1973.74 1914.17,1973.74 1925.48,1991.46 1908.77,1991.46
  region net VCC: 1836.26,2032.5 1836.26,2057.5 1825.26,2050 1825.26,2040
  region net GND: 1933.5,2148.05 1933.5,2123.05 1948.5,2130.55 1948.5,2140.55
  region net +5V: 2204.96,2106.5 2204.96,2076.98 2192.34,2085.83 2192.34,2097.65
  region net GND: 2263.05,2074.02 2288.05,2074.02 2280.55,2059.02 2270.55,2059.02
  region net GND: 2260.08,2104.24 2260.08,2079.24 2249.08,2086.74 2249.08,2096.74
  region net VCC: 2204.96,1867.5 2204.96,1842.5 2193.97,1850 2193.97,1860
  region net VCC: 2236.46,1842.5 2236.46,1867.5 2247.44,1860 2247.44,1850
  region net GND: 2291.57,1842.5 2291.57,1867.5 2302.56,1860 2302.56,1850
  region net GND: 2288.32,1872.72 2263.32,1872.72 2270.82,1887.72 2280.82,1887.72
  region net GND: 2718.32,2467.3 2743.32,2467.3 2735.82,2452.3 2725.82,2452.3
  region net PD1: 2659.97,2497.5 2659.97,2472.5 2648.97,2480 2648.97,2490
  region net GND: 2746.57,2377.5 2746.57,2402.5 2757.56,2395 2757.56,2385
  region net GND: 2743.32,2407.7 2718.32,2407.7 2725.82,2422.7 2735.82,2422.7
  region net PD0: 2659.97,2402.5 2659.97,2377.5 2652,2385 2652,2395
  region net GND: 2236.46,2159.69 2236.46,2184.69 2247.44,2177.19 2247.44,2167.19
  region net VCC: 2291.57,2159.69 2291.57,2184.69 2302.56,2177.19 2302.56,2167.19
  region net GND: 2051.52,1967.72 2029.96,1967.72 2034.02,1982.72 2044.02,1982.72
  region net GND: 2037.55,1932.28 2061.46,1932.28 2072.12,1917.28 2057.98,1917.28
  region net VCC: 2116.57,1937.5 2116.57,1962.5 2127.56,1955 2127.56,1945
  region net VCC: 2113.32,1967.72 2088.32,1967.72 2095.82,1978.71 2105.82,1978.71
  region net GND: 2033.2,2012.28 2058.2,2012.28 2050.7,2001.29 2040.7,2001.29
  region net GND: 2058.2,2047.72 2033.2,2047.72 2040.7,2062.72 2050.7,2062.72
  region net VCC: 2085.08,2012.28 2106.64,2012.28 2099.14,1997.28 2089.14,1997.28
  region net VCC: 2113.32,2047.72 2088.32,2047.72 2095.82,2062.72 2105.82,2062.72
  region net GND: 2058.2,2132.72 2033.2,2132.72 2040.7,2147.72 2050.7,2147.72
  region net GND: 2033.2,2097.28 2058.2,2097.28 2050.7,2082.28 2040.7,2082.28
  region net GND: 2029.96,2127.5 2029.96,2102.5 2018.97,2110 2018.97,2120
  region net VCC: 2113.32,2132.72 2088.32,2132.72 2095.82,2147.72 2105.82,2147.72
  region net VCC: 2088.32,2097.28 2113.32,2097.28 2105.82,2082.28 2095.82,2082.28
  region net GND: 2033.2,2177.28 2058.2,2177.28 2050.7,2162.28 2040.7,2162.28
  region net VCC: 2088.32,2177.28 2113.32,2177.28 2105.82,2162.28 2095.82,2162.28
  region net 12V: 2243.03,2489.74 2282.4,2489.74 2270.59,2466.11 2254.84,2466.11
  region net +5V: 2368.03,2596.03 2338.5,2596.03 2347.36,2608.65 2359.17,2608.65
  region net GND: 2431.31,2489.74 2456.31,2489.74 2448.81,2474.74 2438.81,2474.74
  region net GND: 2456.31,2596.03 2431.31,2596.03 2438.81,2611.03 2448.81,2611.03
  region net GND: 2510.76,1895.53 2535.76,1895.53 2528.26,1906.52 2518.26,1906.52
  region net PB2: 2506.26,1832.84 2506.26,1807.84 2491.26,1815.34 2491.26,1825.34
  region net BOOT0: 2026.93,1867.7 2026.93,1892.7 2011.93,1885.2 2011.93,1875.2
  region net GND: 2117.99,1867.71 2117.99,1892.71 2128.99,1885.21 2128.99,1875.21
  region net GND: 2086.24,1892.71 2086.24,1867.71 2075.25,1875.21 2075.25,1885.21
  region net GND: 2288.05,1944.7 2263.05,1944.7 2270.55,1959.7 2280.55,1959.7
  region net GND: 2263.05,1909.26 2288.05,1909.26 2280.55,1898.27 2270.55,1898.27
  region net +5V: 2204.69,1941.75 2204.69,1912.22 2192.06,1921.08 2192.06,1932.89
  region net GND: 2288.05,2024.7 2263.05,2024.7 2270.55,2039.7 2280.55,2039.7
  region net GND: 2263.05,1989.27 2288.05,1989.27 2280.55,1974.27 2270.55,1974.27
  region net VCC: 2236.18,1994.48 2236.18,2019.48 2247.17,2011.98 2247.17,2001.98
  region net RESET: 2535.76,2013.78 2510.76,2013.78 2518.26,2002.79 2528.26,2002.79
  region net VCC: 2506.26,1971.53 2526.49,1986.22 2508.78,1991.9 2500.59,1985.95
  region net PD1: 2510.76,2205.53 2535.76,2205.53 2528.26,2216.52 2518.26,2216.52
  region net PD0: 2506.26,2129.97 2525.26,2146.22 2508.49,2151.62 2500.87,2145.1
  region net PD0: 2535.76,2146.22 2510.76,2146.22 2518.26,2157.21 2528.26,2157.21
  region net PB1: 2910.76,1749 2885.76,1749 2893.26,1738.01 2903.26,1738.01
  region net VCC: 1600.76,1691 1625.76,1691 1618.26,1701.99 1608.26,1701.99
  region net SCL: 2350.48,2107.07 2332.47,2107.06 2336.47,2115.47 2346.47,2115.47
  region net SCL: 2411.15,2615.52 2394.42,2622.19 2394.67,2613.04 2404.67,2609.05
  region net PA9: 2188.52,1910.06 2175.78,1897.32 2172.67,1906.09 2179.74,1913.17
  region net PA9: 2162.2,2326.31 2180.21,2326.31 2176.2,2317.9 2166.2,2317.9
  region net PA9: 2168,2396.72 2155.27,2383.98 2152.16,2392.76 2159.23,2399.83
  region net PA9: 2099.38,2619.89 2117.39,2619.89 2113.39,2611.48 2103.39,2611.48
  region net PA7: 2443.22,2045.05 2430.48,2057.78 2439.26,2060.9 2446.33,2053.82
  region net PA7: 2818.43,2358.66 2836.44,2358.66 2832.43,2350.25 2822.43,2350.25
  region net SWDIO: 2334.24,1690.52 2334.24,1708.54 2325.84,1704.53 2325.84,1694.53
  region net SWDIO: 2079.02,1638.85 2066.28,1651.59 2075.06,1654.7 2082.13,1647.63
  region net SWCLK: 2567.6,1872.77 2585.61,1872.77 2581.6,1864.36 2571.6,1864.36
  region net BOOT0: 2597.97,1924.99 2585.25,1912.23 2594.03,1909.14 2601.09,1916.22
  region net PB2: 2324.33,1992.53 2342.34,1992.53 2338.33,1984.12 2328.33,1984.12
  region net PD1: 2551.37,2250.17 2533.39,2251.18 2537.85,2259.34 2547.85,2258.78
  region net PD1: 2542.69,2230.76 2529.95,2243.49 2526.84,2234.72 2533.91,2227.65
  region net PD1: 2302.15,2261.91 2289.42,2249.17 2286.31,2257.95 2293.38,2265.02
  region net PD1: 2270.09,2293.97 2257.35,2281.24 2266.13,2278.13 2273.2,2285.2
  region net PD1: 2521.7,2514.94 2512.16,2499.66 2521.34,2498.5 2526.78,2507.2
  region net PD0: 2701.45,2004.43 2688.71,1991.69 2685.6,2000.47 2692.67,2007.54
  region net PD0: 2505.5,2453.22 2492.76,2440.49 2501.54,2437.38 2508.61,2444.45
  region net PB1: 2889.26,1587.21 2907.27,1587.21 2903.26,1595.62 2893.26,1595.62
  region net RESET: 2390.82,2124.46 2408.83,2124.46 2404.83,2116.05 2394.83,2116.05
  region net RESET: 2631.19,1980.72 2631.19,1998.74 2622.78,1994.73 2622.78,1984.73
  region net RESET: 2674.33,2062.69 2661.59,2075.43 2670.37,2078.54 2677.44,2071.47
  region net RESET: 2696.87,2526.41 2687.16,2511.24 2696.33,2509.99 2701.85,2518.61
  region net PC13: 2444.79,2237.21 2462.8,2237.21 2458.8,2228.8 2448.8,2228.8
  region net PC13: 2577.09,2082.69 2577.09,2100.7 2568.69,2096.69 2568.69,2086.69
  region net PC13: 2601.82,1745.96 2589.08,1758.69 2585.97,1749.92 2593.04,1742.85
  region net PC13: 2152.71,1578.09 2152.71,1596.1 2161.12,1592.09 2161.12,1582.09
  region net PA10: 1597.5,1594.79 1597.5,1612.81 1589.1,1608.8 1589.1,1598.8
  region net PA10: 1918.39,2626.3 1936.4,2626.3 1932.39,2617.89 1922.39,2617.89
  region net VCC: 2485.81,1728.23 2473.07,1740.96 2469.96,1732.19 2477.03,1725.12
  region net VCC: 2139.55,1918.39 2126.81,1905.66 2135.59,1902.55 2142.66,1909.62
  region net VCC: 2118.56,1925.58 2136.57,1925.58 2132.56,1933.99 2122.56,1933.99
  region net VCC: 2352.11,1936.83 2370.12,1936.83 2366.11,1945.24 2356.11,1945.24
  region net VCC: 2363.24,2075.51 2381.25,2075.51 2377.24,2067.1 2367.24,2067.1
  region net VCC: 2394.76,1808.08 2382.02,1795.34 2378.91,1804.12 2385.98,1811.19
  region net VCC: 2385,1788.15 2403.01,1788.15 2399.01,1779.74 2389.01,1779.74
  region net VCC: 2459.77,2028.75 2477.17,2033.41 2476.22,2024.46 2465.07,2021.47
  region net VCC: 2377.4,2321.87 2364.67,2334.6 2361.56,2325.83 2368.63,2318.76
  region net GND: 1995.77,1800.16 1950.77,1800.16 1968.26,1779.16 1978.26,1779.16
  region net +5V: 1671.39,1849.94 1703.21,1818.13 1706.32,1844.71 1697.97,1853.06
  region net GND: 2867.33,1978.06 2900.21,2010.94 2871.96,2013.38 2864.89,2006.31
  region net GND: 2867.33,1981.95 2900.21,1949.06 2871.96,1946.63 2864.89,1953.7
  region net +5V: 2896.32,1910.94 2929.21,1878.06 2932.29,1905.67 2923.93,1914.02
  region net GND: 2811.52,1670.51 2765.02,1670.5 2783.26,1692.21 2793.26,1692.21
  region net GND: 1911.32,1690.94 1944.21,1658.06 1946.64,1686.31 1939.57,1693.38
  region net SWCLK: 1811.32,1629.06 1844.21,1661.94 1846.64,1633.69 1839.57,1626.62
  region net GND: 2544.44,2764.07 2582.03,2726.49 2549.23,2724.21 2542.16,2731.28
  region net 12V: 2300.7,2401.86 2226.92,2399.51 2254.84,2434.87 2270.59,2435.37
  region net GND: 2488.58,2409.37 2417.43,2389.68 2438.81,2431.34 2448.81,2434.11
  region net GND: 2488.58,2409.37 2417.43,2389.68 2438.81,2431.34 2448.81,2434.11
  region net GND: 2467.81,2319.32 2412.47,2368.18 2412.35,2322.34 2422.35,2313.51
  region net GND: 2867.33,2701.95 2900.21,2669.06 2871.96,2666.63 2864.89,2673.7
  region net +5V: 2896.32,2569.06 2929.21,2601.94 2932.29,2574.33 2923.93,2565.98
  region net +5V: 2896.33,2630.94 2929.21,2598.06 2932.29,2625.67 2923.94,2634.02
  region net GND: 2867.33,2333.06 2900.21,2365.94 2871.96,2368.38 2864.89,2361.31
  region net GND: 2867.33,2336.95 2900.21,2304.06 2871.96,2301.62 2864.89,2308.7
  region net +5V: 2896.32,2265.94 2929.21,2233.06 2932.29,2260.67 2923.93,2269.02
  region net +5V: 2896.32,2204.06 2929.21,2236.94 2932.29,2209.33 2923.93,2200.98

## Silkscreen, mask and mechanical layers (free items; w line width, h text height)
Top Overlay:
  text "串口" at 1638.27,2815 h47.24 r356
  text "MS" at 1533.27,2729.25 h31.5
  text "G" at 2972.52,2695 h31.5 r270
  text "G" at 1814.64,2641.2 h19.68 r180
  text "SCL" at 1738.27,2625.16 h19.68
  text "5V" at 1854.64,2621.52 h19.68
  text "RX" at 1909.64,2621.52 h19.68
  text "TX" at 1954.64,2621.52 h19.68
  text "5V" at 3004.02,2580 h31.5 r90
  text "SDA" at 1738.27,2575.16 h19.68
  text "5V" at 1738.27,2525.16 h19.68
  text "G" at 1738.27,2494.84 h19.68 r180
  text "PA7" at 3004.02,2455 h31.5 r90
  text "G" at 2972.52,2320 h31.5 r270
  text "5V" at 3004.02,2220 h31.5 r90
  text "PA6" at 3004.02,2100 h31.5 r90
  text "GND" at 3004.02,1940 h31.5 r90
  text "5V" at 3004.02,1855 h31.5 r90
  text "PB1" at 3004.02,1755 h31.5 r90
  text "串口" at 2293.27,1705 h62.99 r356
  text "G" at 1898.27,1575.75 h31.5 r180
  text "VCC" at 1578.27,1544.25 h31.5
  text "SDO" at 1678.27,1544.25 h31.5
  text "SCK" at 1773.27,1544.25 h31.5
  text "PB0" at 2543.27,1544.25 h31.5
  text "5V" at 2653.27,1544.25 h31.5
  text "GND" at 2743.27,1544.25 h31.5
Bottom Overlay:
  text "GND" at 1673.27,2735 h47.24
  text "5V" at 1672.87,2630 h47.24
  text "SDA" at 1673.07,2535 h47.24
  text "12v" at 2253.27,2465 h47.24
  text "SCL" at 1673.07,2435 h47.24
  text "12v" at 2213.27,2270 h47.24
  text "5V" at 2078.27,1920 h47.24

## Text inside footprints (layer, text, board x,y; h text height)
U9: Top Overlay "D0" at 1611.34,1863.39 h39.37 r90; Top Overlay "VCC" at 1711.29,1863.34 h39.37 r90; Top Overlay "RX" at 1811.37,1863.39 h39.37 r90; Top Overlay "TX" at 1911.32,1863.32 h39.37 r90; Top Overlay "GND" at 2011.4,1863.35 h39.37 r90; Top Overlay "D1" at 2111.34,1863.33 h39.37 r90; Top Overlay "D2" at 1611.34,2218.89 h39.37 r90; Top Overlay "VCC" at 1711.33,2174.85 h39.37 r90; Top Overlay "SCL" at 1811.31,2183.73 h39.37 r90; Top Overlay "SDA" at 1911.35,2178.39 h39.37 r90; Top Overlay "GND" at 2011.39,2180.19 h39.37 r90; Top Overlay "D3" at 2111.34,2218.83 h39.37 r90